# EAGLE board bij mekaar roopzol (EAGLE 5.00)
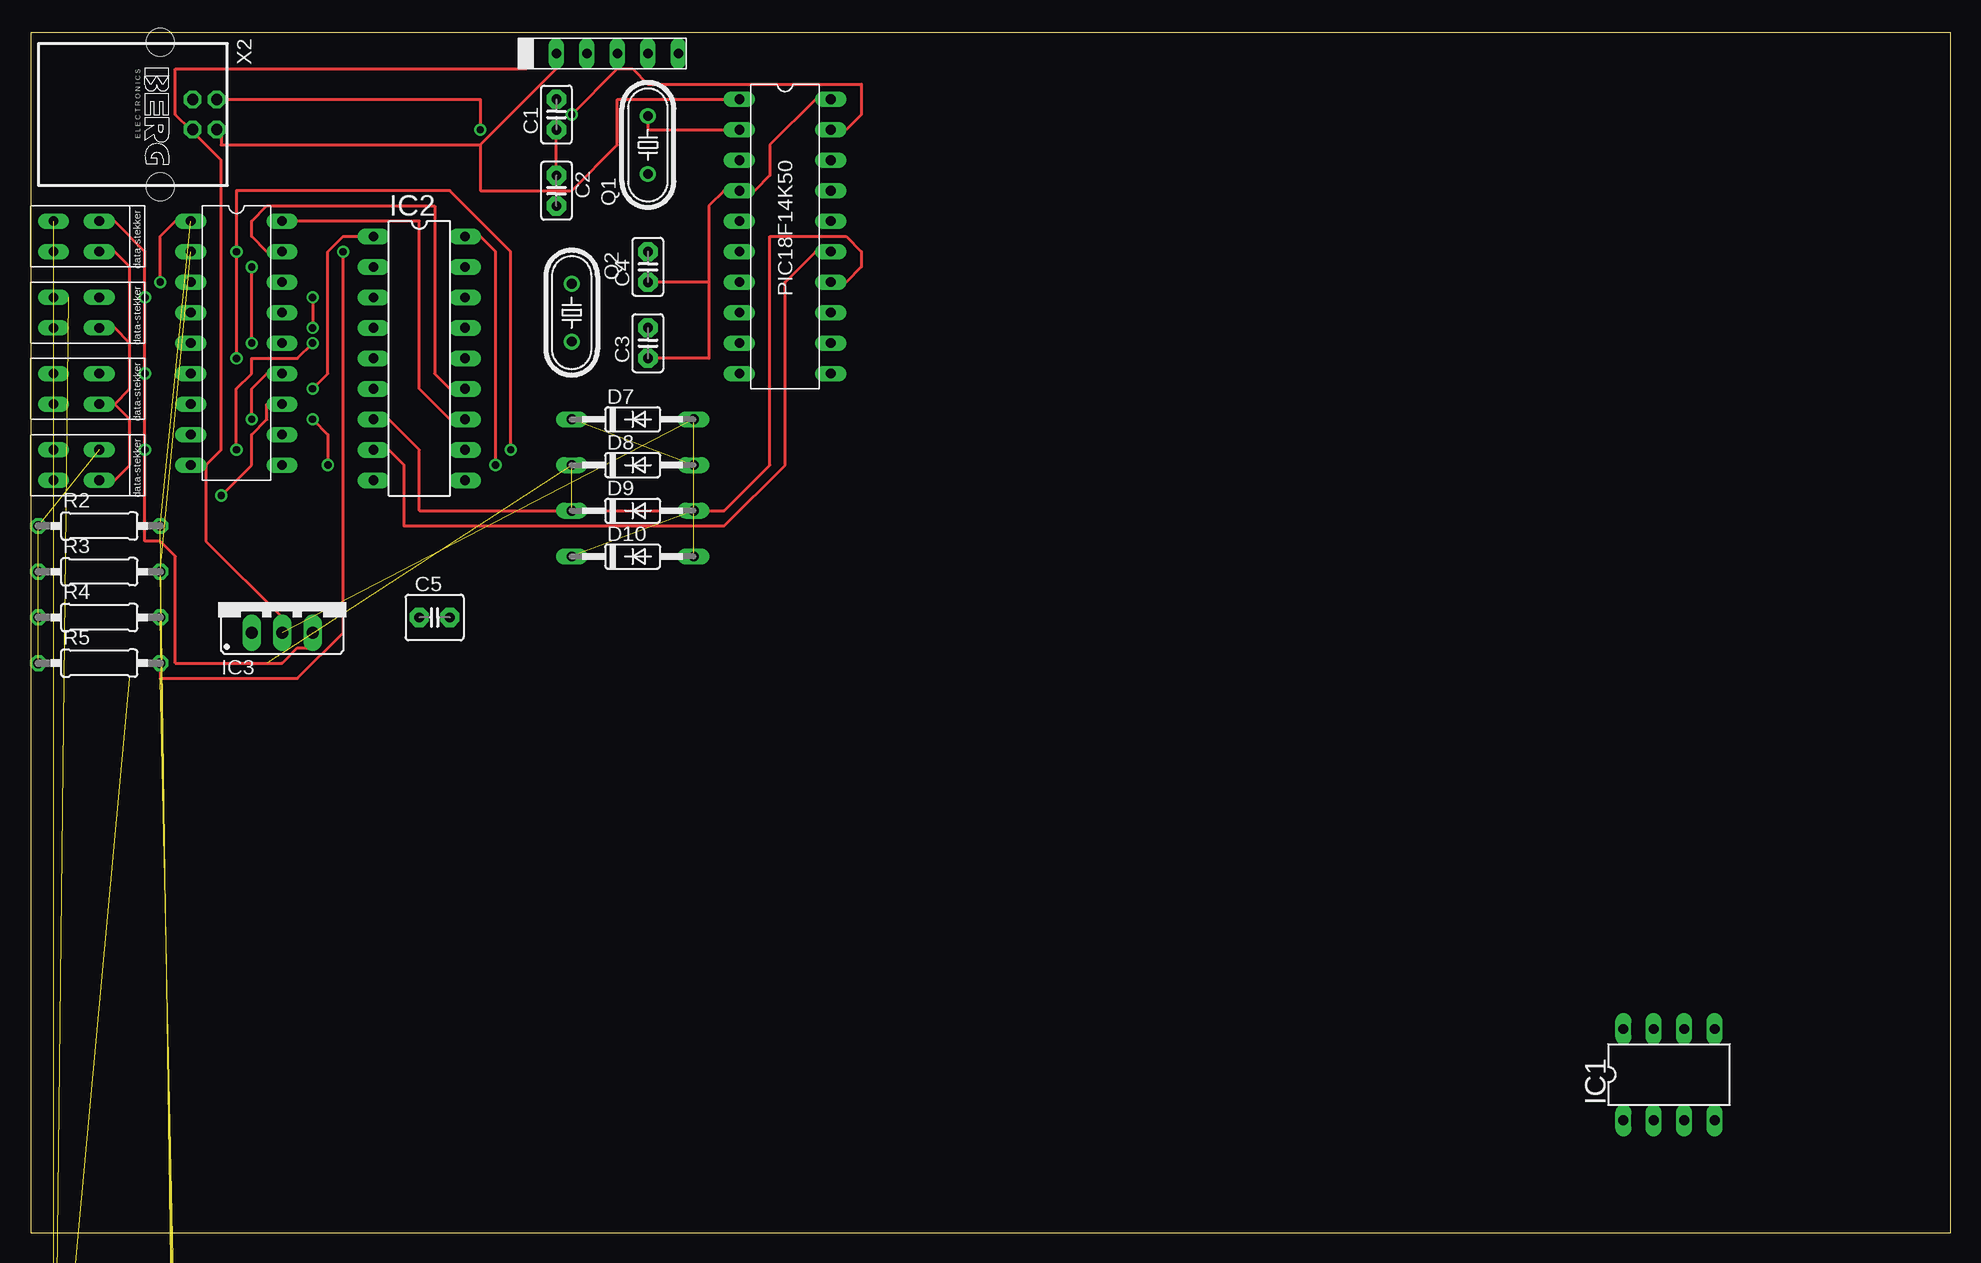
[diagram p0: board, top side]
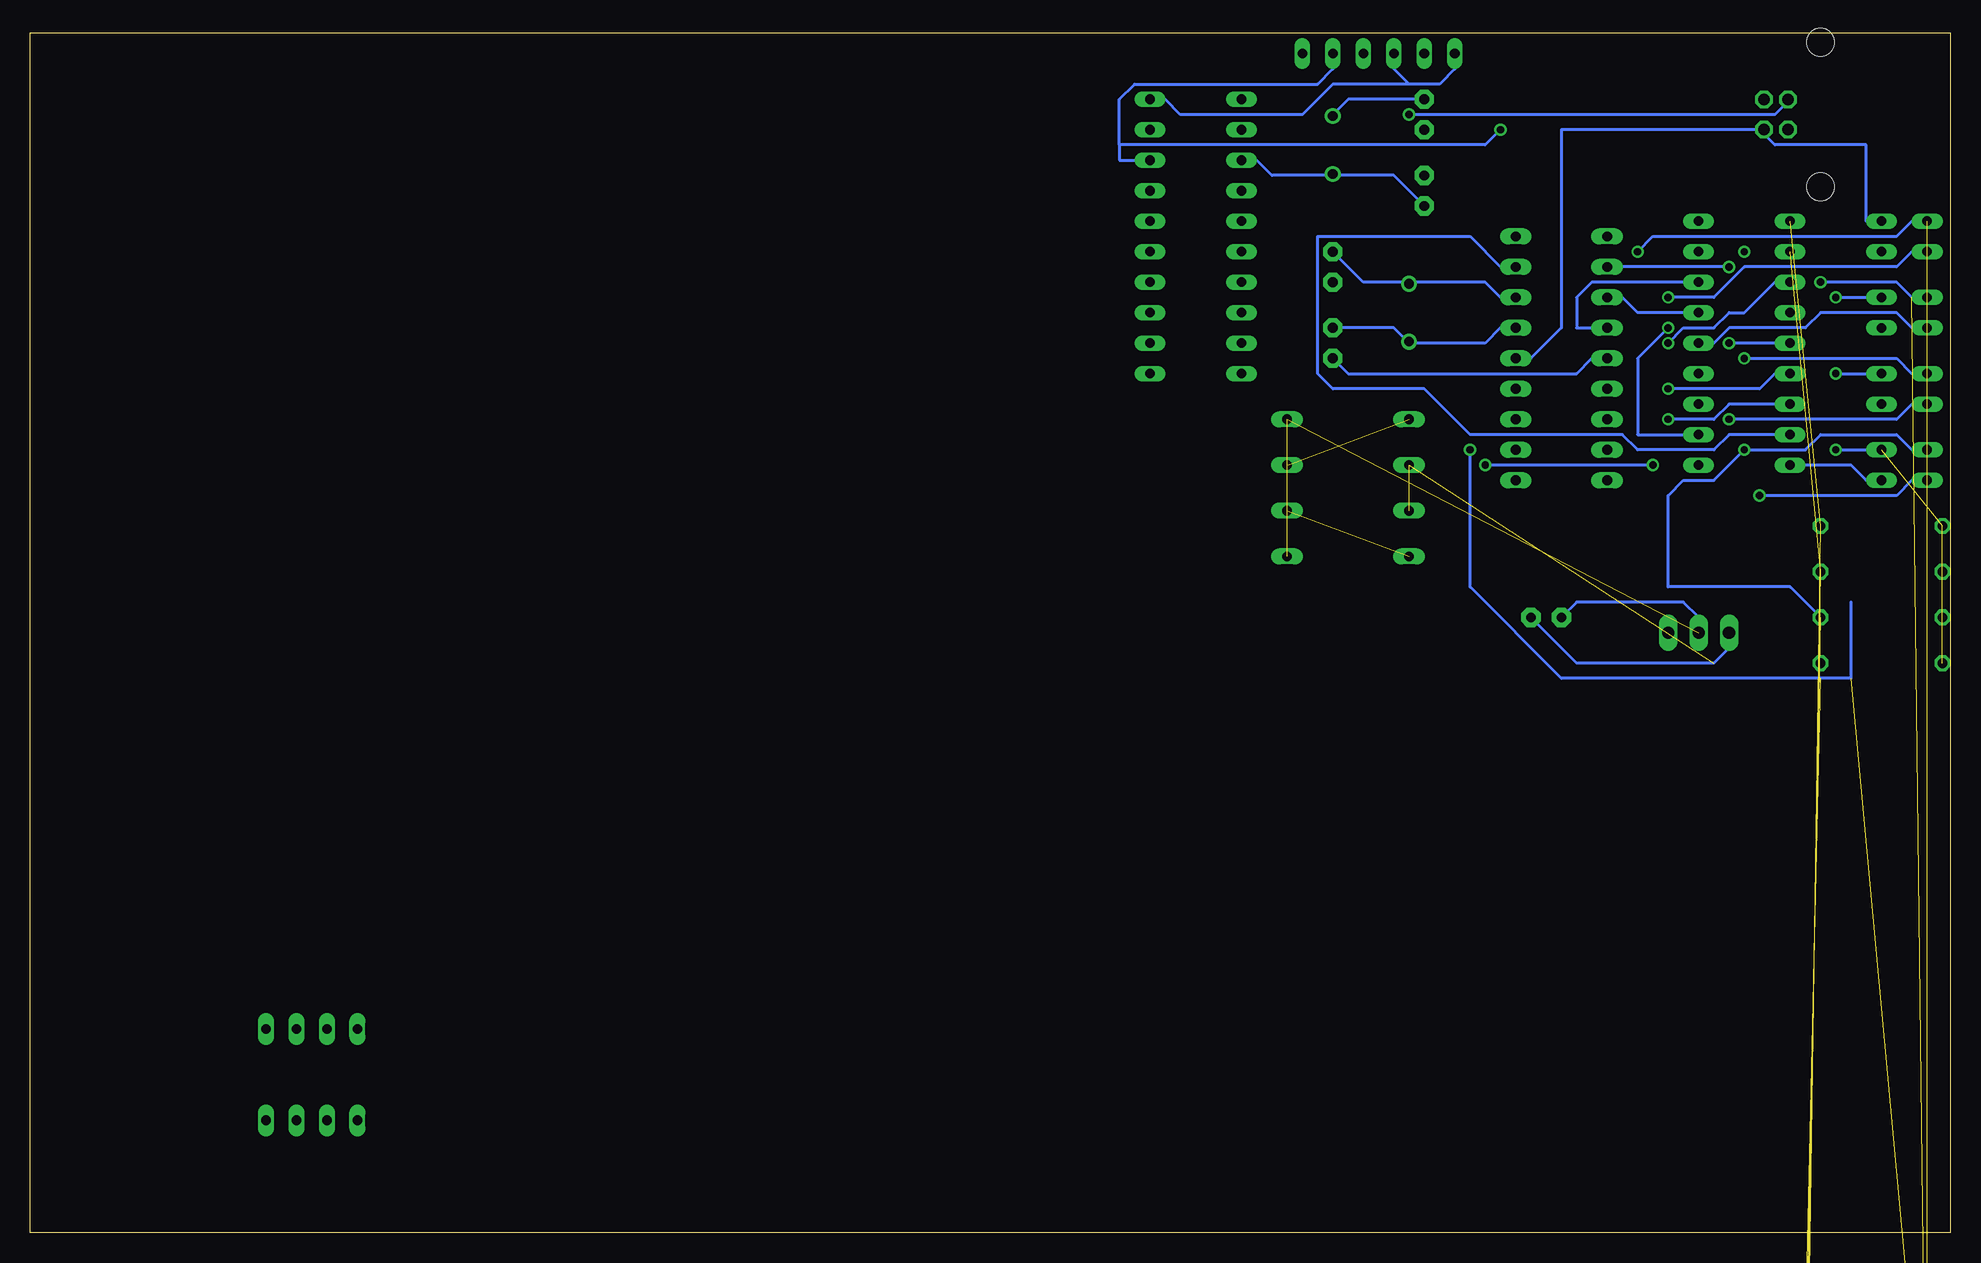
[diagram p1: board, bottom side, seen from below]

Size 160 x 100 mm. Coordinates in mm from the lower left corner, seen from the top.
Outline: 0,0 160,0 160,100 0,100 0,0
Copper layers (1*16): Top 0.035mm / dielectric 1.5mm / Bottom 0.035mm
Design rules "default": minimum track width 10mil, minimum drill 24mil, track to track 8mil, track to pad 8mil, pad to pad 8mil, via to via 8mil, smd to smd 8mil, copper to edge 40mil, drill to drill 8mil, minimum pad ring 10mil, minimum via ring 8mil, stop-mask expansion 4mil, vias tented up to drill 0mil, thermal gap 10mil

## Footprints (pad centres in the part's own frame; a part is rotated, then mirrored left to right if it is on the bottom)
C2.5-2 = drill 0.813 pad 1.6 octagon: 1 -1.27,0; 2 1.27,0
C2.5-4 = drill 0.813 pad 1.6 octagon: 1 -1.27,0; 2 1.27,0
DO35-10 = drill 0.813 long: A 5.08,0; C -5.08,0
DIL8 = drill 0.813 long: 1 -3.81,-3.81; 2 -1.27,-3.81; 3 1.27,-3.81; 4 3.81,-3.81; 5 3.81,3.81; 6 1.27,3.81; 7 -1.27,3.81; 8 -3.81,3.81
DIL18 = drill 0.813 long: 1 -10.16,-3.81; 2 -7.62,-3.81; 3 -5.08,-3.81; 4 -2.54,-3.81; 5 0,-3.81; 6 2.54,-3.81; 7 5.08,-3.81; 8 7.62,-3.81; 9 10.16,-3.81; 10 10.16,3.81; 11 7.62,3.81; 12 5.08,3.81; 13 2.54,3.81; 14 0,3.81; 15 -2.54,3.81; 16 -5.08,3.81; 17 -7.62,3.81; 18 -10.16,3.81
78XXS = drill 1.016 long: GND 0,-2.54; IN -2.54,-2.54; OUT 2.54,-2.54
HC49/S = drill 0.813 round: 1 -2.413,0; 2 2.413,0
0207/10 = drill 0.813 octagon: 1 -5.08,0; 2 5.08,0
E.18F14K50 = drill 0.8 long: RA0/D+/PGD -7.62,3.81; RA1/D-/PGC -5.08,3.81; RA3/MCLR/VPP -2.54,-3.81; RA4/AN3/OSC2/CLKOUT -5.08,-3.81; RA5/OSC1/CLKIN -7.62,-3.81; RB4/AN10/SDI/SDA 7.62,3.81; RB5/AN11/RX/DT 10.16,3.81; RB6/SCK/SCL 12.7,3.81; RB7/TX/CK 12.7,-3.81; RC0/AN4/C12IN+/INT0/VREF+ 0,3.81; RC1/AN5/C12IN1-/INT1/VREF 2.54,3.81; RC2/AN6/P1D/C12IN2-/CVREF/INT2 5.08,3.81; RC3/AN7/P1C/C12IN3-/PGM 5.08,-3.81; RC4/P1B/C12OUT/SRQ 2.54,-3.81; RC5/CCP1/P1A/T0CKI 0,-3.81; RC6/AN8/SS/T13CKI/T1OSCI 7.62,-3.81; RC7/AN9/SDO/T1OSCO 10.16,-3.81; VDD -10.16,-3.81; VSS -10.16,3.81; VUSB -2.54,3.81
P.1.PICKIT-CONNECTOR = drill 0.8 long: 1 0,6.35; 2 0,3.81; 3 0,1.27; 4 0,-1.27; 5 0,-3.81; 6 0,-6.35
P-DIP = drill 0.8 long: RX -3.81,1.27; TX -3.81,-1.27; VDD 0,1.27; VSS 0,-1.27
P-DIP' = drill 0.8 long: COMMON-FREE-WHEELING-DIODES 3.81,-10.16; GEN -3.81,-10.16; IN1 -3.81,10.16; IN2 -3.81,7.62; IN3 -3.81,5.08; IN4 -3.81,2.54; IN5 -3.81,0; IN6 -3.81,-2.54; IN7 -3.81,-5.08; IN8 -3.81,-7.62; OUT1 3.81,10.16; OUT2 3.81,7.62; OUT3 3.81,5.08; OUT4 3.81,2.54; OUT5 3.81,0; OUT6 3.81,-2.54; OUT7 3.81,-5.08; OUT8 3.81,-7.62
PN61729 = drill 0.95 octagon: 1 1.25,4.71; 2 -1.25,4.71; 3 -1.25,2.71; 4 1.25,2.71 | hole 2.3: -6.02,0; 6.02,0

## Placement (x,y rotation side)
C1  [C2.5-2]  43.81,93.18 90 top
C2  [C2.5-2]  43.81,86.83 270 top
C3  [C2.5-2]  51.43,74.13 90 top
C4  [C2.5-2]  51.43,80.48 90 top
C5  [C2.5-4]  33.65,51.27 0 top
D2  BA243A  [DO35-10]  6.98,-9.69 0 top  (outside the outline)
D3  BA243A  [DO35-10]  6.98,-16.04 0 top  (outside the outline)
D4  BA243A  [DO35-10]  6.98,-22.39 0 top  (outside the outline)
D5  BA243A  [DO35-10]  6.98,-28.74 0 top  (outside the outline)
D7  BA243A  [DO35-10]  50.16,67.78 0 top
D8  BA243A  [DO35-10]  50.16,63.97 0 top
D9  BA243A  [DO35-10]  50.16,60.16 0 top
D10  BA243A  [DO35-10]  50.16,56.35 0 top
IC1  PIC12F629P  [DIL8]  136.52,13.17 0 top
IC2  PIC16F628P  [DIL18]  32.38,72.86 270 top
IC3  [78XXS]  20.95,52.54 0 top
Q1  [HC49/S]  51.43,90.64 90 top
Q2  [HC49/S]  45.08,76.67 270 top
R2  [0207/10]  5.71,58.89 0 top
R3  [0207/10]  5.71,55.08 0 top
R4  [0207/10]  5.71,51.27 0 top
R5  [0207/10]  5.71,47.46 0 top
U$1  D.2.18F14K50  [E.18F14K50]  62.86,84.29 270 top
U$2  D.1.PICKIT-2-CONNECTOR  [P.1.PICKIT-CONNECTOR]  47.62,98.26 90 top
U$3  DATA-STEKKER  [P-DIP]  5.71,83.02 0 top
U$4  DATA-STEKKER  [P-DIP]  5.71,76.67 0 top
U$5  DATA-STEKKER  [P-DIP]  5.71,70.32 0 top
U$6  DATA-STEKKER  [P-DIP]  5.71,63.97 0 top
U$7  ULN2803  [P-DIP']  17.14,74.13 0 top
X2  [PN61729]  10.79,93.18 270 top

## Library data of the parts
C1-C5 = capacitor-wima
D2-D5 D7-D10 = diode
IC1 IC2 = microchip
IC3 = v-reg
Q1 Q2 = crystal
R2-R5 = rcl
U$1 = pic18f14k50
U$2 = pickit-2-connector
U$3-U$6 = data-stekker
U$7 = ULN2803
X2 = con-berg

## Nets
N$1: U$1.RA1/D-/PGC U$2.5 X2.2
N$2: U$1.RA0/D+/PGD U$2.4 X2.3
N$3: C3.1 C4.1 C5.1 D7.A D10.A IC2.5 IC3.GND U$1.RA3/MCLR/VPP U$1.VSS U$2.1 U$2.3 U$3.VSS U$4.VSS U$5.VSS U$6.VSS U$7.GEN X2.4
N$4: D7.C D8.A
N$5: C5.2 D8.C D9.C IC3.IN
N$6: D2.C U$3.RX
N$7: IC2.17 U$7.IN8
N$8: D9.A D10.C
N$9: C1.2 Q1.2 U$1.RA5/OSC1/CLKIN
N$10: C2.2 Q1.1 U$1.RA4/AN3/OSC2/CLKOUT
N$11: IC2.3 U$7.OUT4
N$12: C3.2 IC2.15 Q2.2
N$13: C4.2 IC2.16 Q2.1
N$14: IC2.8 U$1.RC1/AN5/C12IN1-/INT1/VREF
N$15: IC2.7 U$1.RC2/AN6/P1D/C12IN2-/CVREF/INT2
N$16: U$1.RC0/AN4/C12IN+/INT0/VREF+
N$17: C1.1 C2.1
N$18: IC2.18 U$7.IN7
N$19: IC2.1 U$7.IN6
N$20: IC2.2 U$7.IN5
N$21: U$6.TX U$7.OUT7
N$22: U$5.TX U$7.OUT6
N$23: U$4.TX U$7.OUT5
N$24: D2.A R5.2
N$25: D3.A R4.2 U$7.IN3
N$26: D4.C U$5.RX
N$27: D5.C U$4.RX
N$28: IC2.14 IC3.OUT R2.1 R3.1 R4.1 R5.1 U$1.VDD U$2.2 U$3.VDD U$4.VDD U$5.VDD U$6.VDD X2.1
N$29: IC2.4 U$7.OUT3
N$30: IC2.13 U$7.OUT2
N$31: IC2.12 U$7.OUT1
N$32: U$3.TX U$7.OUT8
N$33: D3.C U$6.RX
N$34: D4.A R3.2 U$7.IN2
N$35: D5.A R2.2 U$7.IN1
VDD: IC1.1
VSS: IC1.8

## Tracks (layer width: path | path; a pad name or v marks a point on that pad's centre or on a via)
N$1  (via drill 0.61)
  Top 0.254: v37.46,91.91 37.46,94.45 15.87,94.45 X2.2
  Bottom 0.254: 69.21,90.64 69.21,89.37 U$1.RA1/D-/PGC | 69.21,90.64 69.21,94.45 67.94,95.72 52.7,95.72 51.43,96.99 U$2.5 | v37.46,91.91 38.73,90.64 69.21,90.64
N$2  (via drill 0.61)
  Top 0.254: 48.89,96.99 50.16,96.99 51.43,95.72 69.21,95.72 69.21,93.18 67.94,91.91 U$1.RA0/D+/PGD | v45.08,93.18 48.89,96.99 | 48.89,96.99 U$2.4
  Bottom 0.254: v45.08,93.18 14.6,93.18 13.33,94.45 X2.3
N$3  (2 unrouted)
  Top 0.254: 56.51,79.21 56.51,72.86 C3.1 | 56.51,79.21 56.51,85.56 57.78,86.83 U$1.RA3/MCLR/VPP 60.32,86.83 61.59,88.1 61.59,90.64 65.4,94.45 U$1.VSS | 56.51,79.21 C4.1 | 6.98,69.05 8.25,70.32 8.25,74.13 | 8.25,74.13 6.98,75.4 U$4.VSS | 8.25,74.13 8.25,80.48 6.98,81.75 U$3.VSS | 13.33,91.91 15.87,89.37 15.87,65.24 14.6,63.97 | 14.6,63.97 14.6,57.62 20.95,51.27 IC3.GND | U$7.GEN 14.6,63.97 | 13.33,91.91 12.06,93.18 12.06,96.99 41.27,96.99 U$2.1 | 13.33,91.91 X2.4 | 6.98,69.05 8.25,67.78 8.25,63.97 6.98,62.7 U$6.VSS | 6.98,69.05 U$5.VSS
  Bottom 0.254: C3.1 50.16,71.59 31.11,71.59 29.84,72.86 IC2.5 | 45.08,95.72 42.54,95.72 41.27,96.99 U$2.1 | 45.08,95.72 46.35,96.99 U$2.3 | U$6.VSS 6.98,62.7 8.25,63.97 U$7.GEN | C5.1 31.11,52.54 22.22,52.54 20.95,51.27 IC3.GND | 45.08,95.72 51.43,95.72 53.97,93.18 64.13,93.18 65.4,94.45 U$1.VSS
N$4  (1 unrouted)
N$5  (2 unrouted)
  Bottom 0.254: C5.2 31.11,47.46 19.68,47.46 18.41,48.73 IC3.IN
N$6  (1 unrouted)
N$7
  Bottom 0.254: U$7.IN8 18.41,66.51 19.68,65.24 26.03,65.24 27.3,66.51 40,66.51 43.81,70.32 51.43,70.32 52.7,71.59 52.7,83.02 40,83.02 37.46,80.48 IC2.17
N$8  (1 unrouted)
N$9
  Top 0.254: U$1.RA5/OSC1/CLKIN 51.43,91.91 Q1.2 51.43,93.18
  Bottom 0.254: C1.2 50.16,94.45 51.43,93.18 Q1.2
N$10
  Bottom 0.254: 51.43,88.1 56.51,88.1 57.78,89.37 U$1.RA4/AN3/OSC2/CLKOUT | C2.2 46.35,88.1 51.43,88.1 | 51.43,88.1 Q1.1
N$11
  Bottom 0.254: U$7.OUT4 26.03,76.67 27.3,77.94 IC2.3
N$12
  Bottom 0.254: 45.08,74.13 46.35,75.4 C3.2 | 45.08,74.13 38.73,74.13 37.46,75.4 IC2.15 | 45.08,74.13 Q2.2
N$13
  Bottom 0.254: 45.08,79.21 38.73,79.21 37.46,77.94 IC2.16 | C4.2 48.89,79.21 45.08,79.21 | 45.08,79.21 Q2.1
N$14
  Top 0.254: U$1.RC1/AN5/C12IN1-/INT1/VREF 65.4,81.75 62.86,79.21 62.86,63.97 57.78,58.89 31.11,58.89 31.11,63.97 29.84,65.24 IC2.8
N$15
  Top 0.254: U$1.RC2/AN6/P1D/C12IN2-/CVREF/INT2 67.94,79.21 69.21,80.48 69.21,81.75 67.94,83.02 61.59,83.02 61.59,63.97 57.78,60.16 32.38,60.16 32.38,65.24 29.84,67.78 IC2.7
N$17
  Top 0.254: C2.1 C1.1
N$18  (via drill 0.61)
  Top 0.254: v23.49,67.78 24.76,66.51 v24.76,63.97 | v38.73,63.97 38.73,81.75 37.46,83.02 IC2.18
  Bottom 0.254: v23.49,67.78 19.68,67.78 18.41,69.05 U$7.IN7 | v24.76,63.97 v38.73,63.97
N$19  (via drill 0.61)
  Top 0.254: v23.49,70.32 24.76,71.59 24.76,81.75 26.03,83.02 IC2.1
  Bottom 0.254: v23.49,70.32 15.87,70.32 14.6,71.59 U$7.IN6
N$20  (via drill 0.61)
  Top 0.254: v18.41,74.13 v18.41,80.48
  Bottom 0.254: U$7.IN5 v18.41,74.13 | v18.41,80.48 IC2.2
N$21  (via drill 0.61)
  Top 0.254: v15.87,61.43 18.41,63.97 18.41,66.51 19.68,67.78 19.68,69.05 U$7.OUT7
  Bottom 0.254: v15.87,61.43 4.44,61.43 3.17,62.7 U$6.TX
N$22  (via drill 0.61)
  Top 0.254: v18.41,67.78 18.41,70.32 19.68,71.59 U$7.OUT6
  Bottom 0.254: v18.41,67.78 4.44,67.78 3.17,69.05 U$5.TX
N$23
  Bottom 0.254: U$4.TX 3.17,75.4 4.44,76.67 10.79,76.67 12.06,75.4 18.41,75.4 19.68,74.13 U$7.OUT5
N$24  (via drill 0.61)  (1 unrouted)
  Top 0.254: v26.03,81.75 26.03,50 22.22,46.19 10.79,46.19 R5.2
  Bottom 0.254: 3.17,84.29 4.44,83.02 24.76,83.02 v26.03,81.75
N$25  (via drill 0.61)  (1 unrouted)
  Top 0.254: v23.49,74.13 22.22,72.86 18.41,72.86 18.41,71.59 17.14,70.32 v17.14,65.24
  Bottom 0.254: 3.17,65.24 4.44,66.51 10.79,66.51 12.06,65.24 v17.14,65.24 19.68,62.7 22.22,62.7 23.49,61.43 23.49,53.81 13.33,53.81 R4.2 | v23.49,74.13 22.22,75.4 19.68,75.4 18.41,76.67 17.14,76.67 14.6,79.21 U$7.IN3
N$26  (via drill 0.61)  (1 unrouted)
  Top 0.254: v17.14,72.86 v17.14,81.75 17.14,86.83 34.92,86.83 40,81.75 v40,65.24
  Bottom 0.254: v17.14,72.86 4.44,72.86 3.17,71.59 U$5.RX | 8.25,52.54 8.25,46.19 32.38,46.19 40,53.81 v40,65.24
N$27  (via drill 0.61)  (1 unrouted)
  Top 0.254: 12.06,84.29 10.79,83.02 v10.79,79.21
  Bottom 0.254: v10.79,79.21 4.44,79.21 3.17,77.94 U$4.RX
N$28  (via drill 0.61)  (4 unrouted)
  Top 0.254: U$3.VDD 6.98,84.29 9.52,81.75 v9.52,77.94 v9.52,71.59 v9.52,65.24 9.52,57.62 10.79,57.62 12.06,56.35 12.06,47.46 20.95,47.46 22.22,48.73 23.49,48.73 IC3.OUT | 37.46,90.64 43.81,96.99 U$2.2 | 37.46,90.64 15.87,90.64 15.87,91.91 X2.1 | 37.46,90.64 37.46,86.83 45.08,86.83 48.89,90.64 48.89,94.45 U$1.VDD
  Bottom 0.254: v9.52,65.24 U$6.VDD | v9.52,71.59 U$5.VDD | v9.52,77.94 6.98,77.94 U$4.VDD | 15.87,91.91 32.38,91.91 32.38,75.4 34.92,72.86 IC2.14 | 15.87,91.91 14.6,90.64 6.98,90.64 6.98,84.29 U$3.VDD | 15.87,91.91 X2.1
N$29
  Bottom 0.254: U$7.OUT3 29.84,79.21 31.11,77.94 31.11,75.4 IC2.4
N$30
  Top 0.254: U$7.OUT2 19.68,81.75 18.41,83.02 18.41,84.29 19.68,85.56 33.65,85.56 33.65,71.59 34.92,70.32 IC2.13
N$31
  Top 0.254: U$7.OUT1 32.38,84.29 32.38,70.32 34.92,67.78 IC2.12
N$32  (via drill 0.61)
  Top 0.254: v23.49,77.94 v23.49,75.4
  Bottom 0.254: v23.49,77.94 19.68,77.94 17.14,80.48 4.44,80.48 3.17,81.75 U$3.TX | v23.49,75.4 26.03,72.86 26.03,66.51 U$7.OUT8
N$33  (1 unrouted)
N$34  (2 unrouted)
N$35  (2 unrouted)